# Altium PCB Sequential_Logic_Latch_FF.PcbDoc
Units mm, origin at the board's own origin, x right, y up, seen from the top; angles counter-clockwise.
Board outline 147.9 x 87.5 mm, 2 copper layers (Top Layer, Bottom Layer); 53 components, 47 nets, 208 pads, 16 vias.
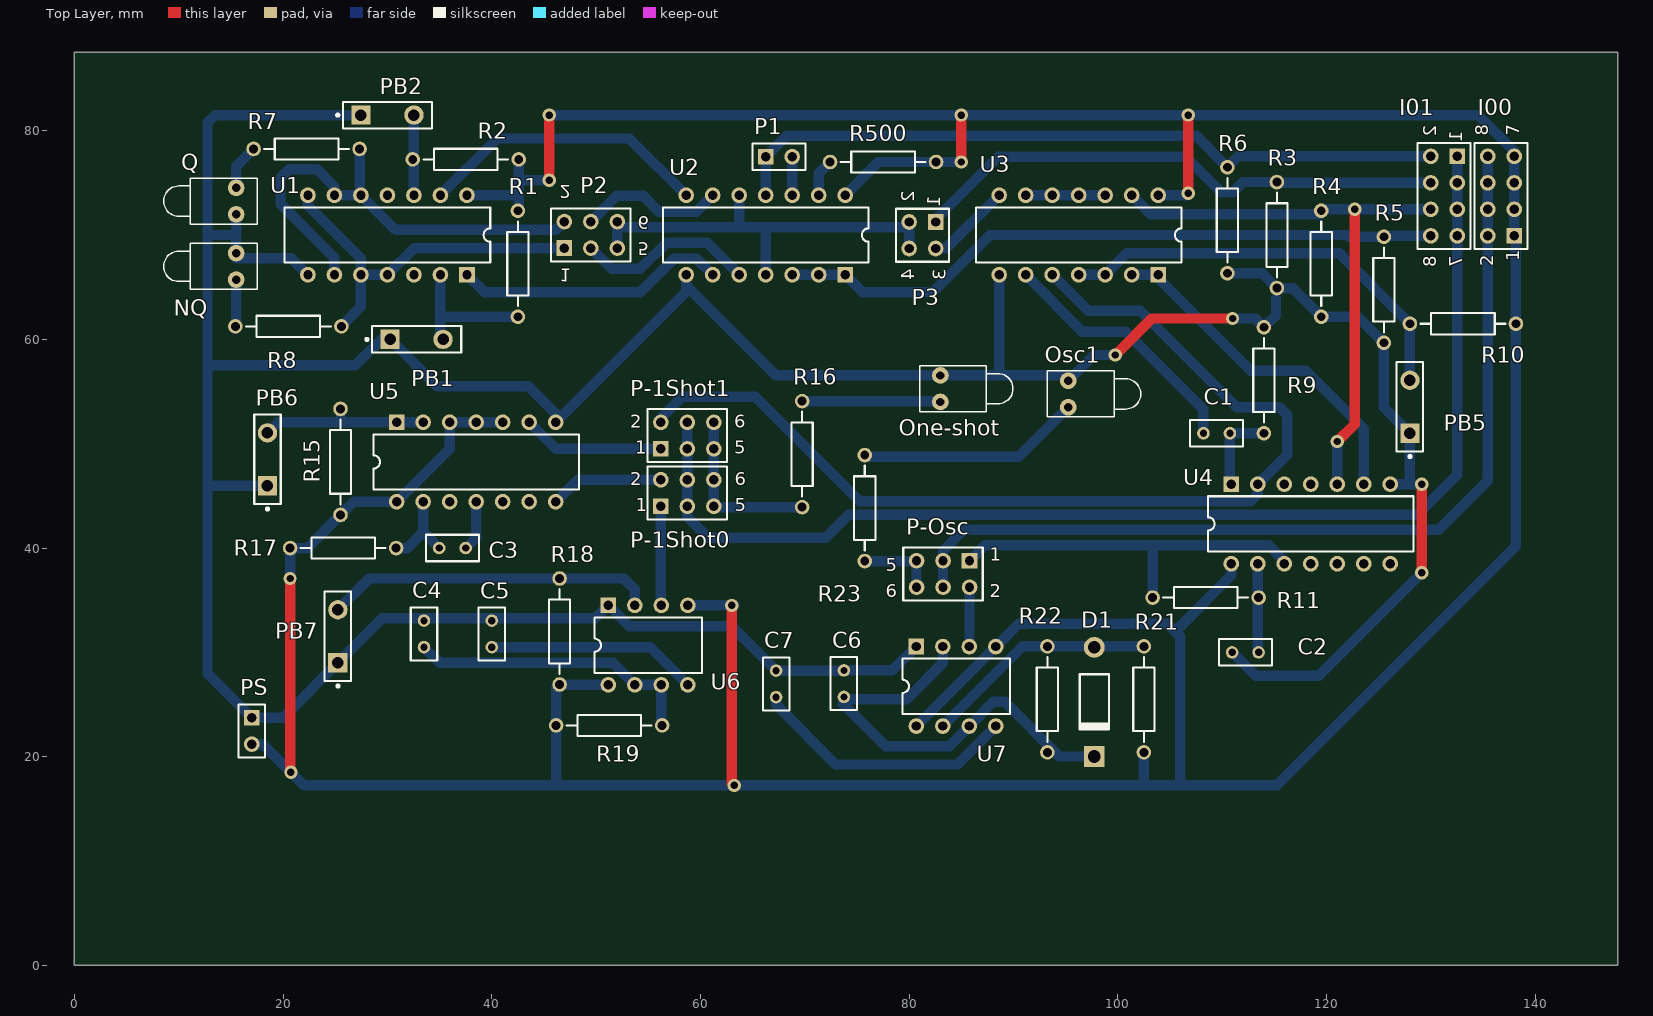
[diagram p0: Top Layer view]
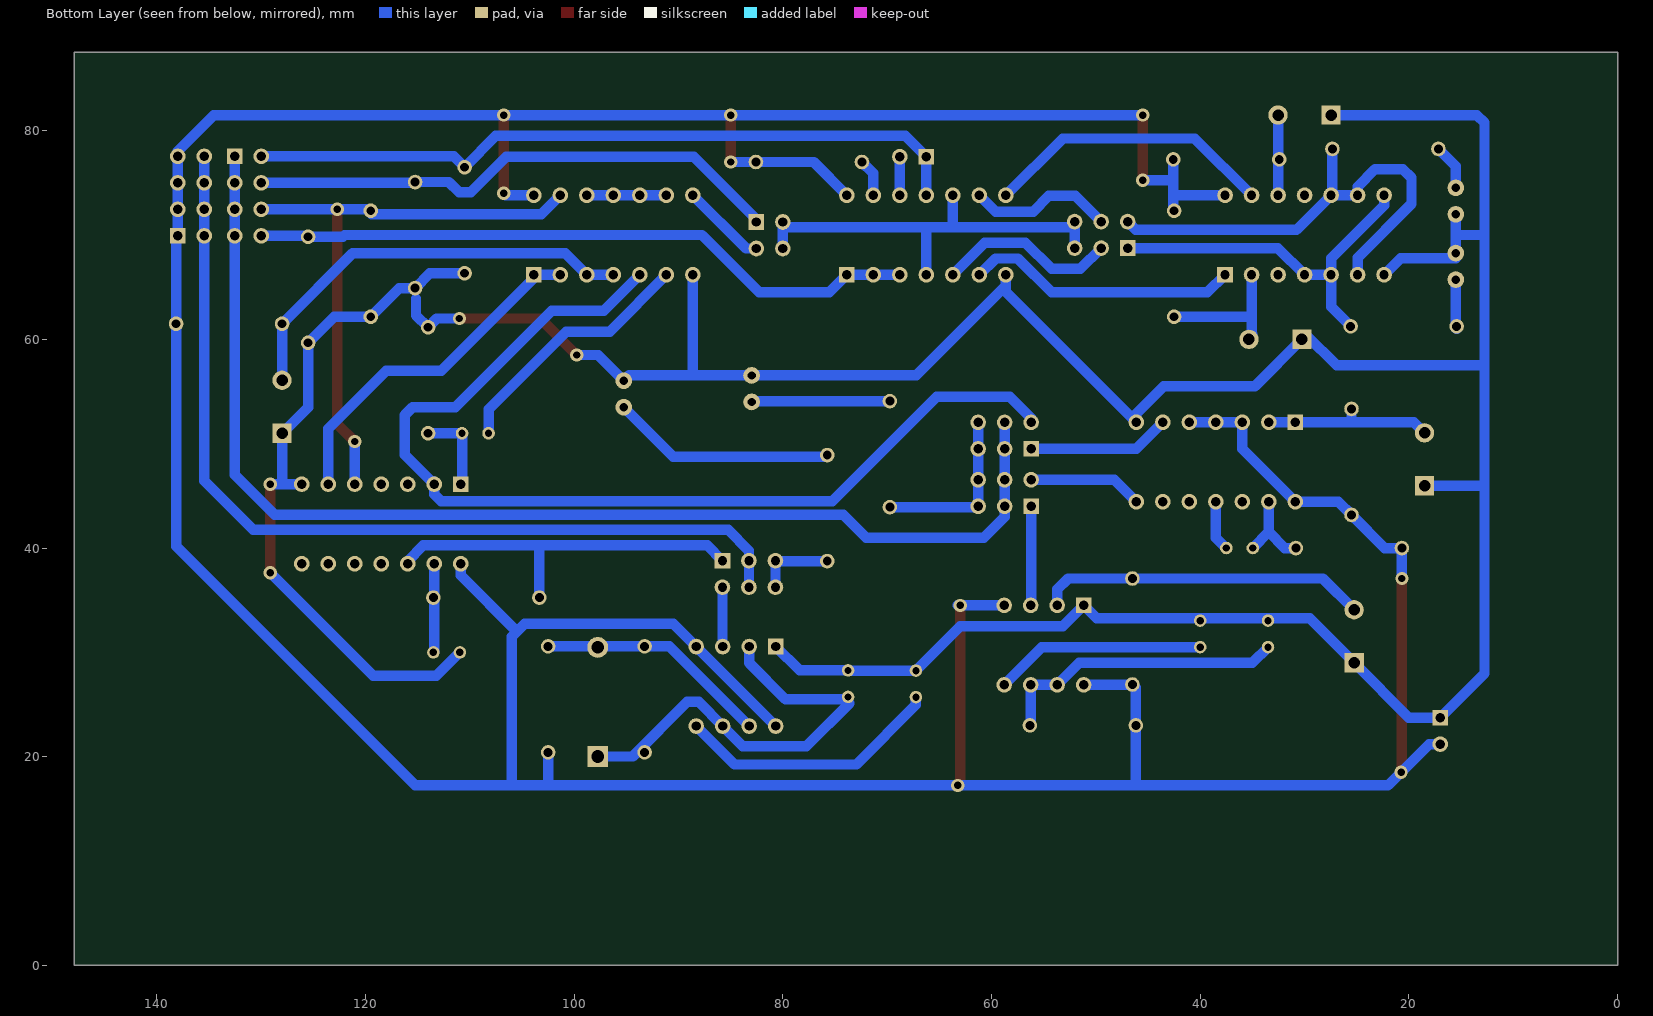
[diagram p1: Bottom Layer view, seen from below]

## Layer stack, top to bottom
Top Solder: solder mask 0.0102, Solder Resist, Dk 3.5
Top Layer: signal copper 0.0356
Dielectric1: dielectric 0.32, FR-4, Dk 4.8
Bottom Layer: signal copper 0.0356
Bottom Solder: solder mask 0.0102, Solder Resist, Dk 3.5

## Board outline
0,0 0,87.5 147.9,87.5 147.9,0

## Design rules (kind name [scope] priority, off if disabled: settings)
AssemblyTestPointUsage [All] p1: valid=2
Clearance [All] p1: gap=0.254
ComponentClearance ComponentClearance_header2x5 [InComponent('I00') vs InComponent('I01')] p1: gap=0.1 collisioncheckmode=3 verticalgap=0.2 showdistances=FALSE
ComponentClearance ComponentClearance_header2x3 [InComponent('P-1Shot1') vs InComponent('P-1Shot0')] p2: gap=0.2 collisioncheckmode=3 verticalgap=0.254 showdistances=FALSE
ComponentClearance [All] p3: gap=0.254 collisioncheckmode=3 verticalgap=0.254 showdistances=FALSE
FabricationTestPointUsage TestPointUsage [All] p1: valid=2 allowmultiple=FALSE
FabricationTestpoint Testpoint [All] p1: side=3 testpointundercomponent=TRUE minsize=1.016 maxsize=2.54 preferedsize=1.524 minholesize=0 maxholesize=1.016 preferedholesize=0.813 testpointgrid=0.025 allowsidetop=TRUE allowsidebottom=TRUE usegrid=TRUE gridtolerance=0
MinimumSolderMaskSliver [All] p1: minsoldermaskwidth=0.15
PolygonConnect [All] p1: connectstyle=Relief reliefconductorwidth=0.254 reliefentries=4 polygonreliefangle="90 Angle" airgapwidth=0.254
RoutingVias [All] p1: holewidth=0.711 width=1.27 viastyle="Through Hole" minholewidth=0.711 minwidth=1.27 maxholewidth=0.711 maxwidth=1.27
SilkToSolderMaskClearance SilkToSolderMaskClearance_LED1 [IsPad vs HasFootprint('LED-1')] p1: minsilkscreentomaskgap=0.06 clearancetoexposedcopper=TRUE
SilkToSolderMaskClearance [IsPad] p2: minsilkscreentomaskgap=0.15 clearancetoexposedcopper=TRUE
SolderMaskExpansion [All] p1: expansion=0.102
Width [All] p1: maxlimit=1.05 minlimit=0.25 preferedwidth=1
24 further rules are at their usual default settings.

## Components (designator, comment, footprint, x,y, rotation, side; value= is the part's Value field where it differs from the comment)
C1 "1uF" RAD-0.1 109.48,51 r0 top
C2 "1uF" RAD-0.1 112.23,30 r0 top
C3 "1uF" RAD-0.1 36.23,40 r180 top
C4 "1uF" RAD-0.1 33.5,31.77 r270 top
C5 "0.01uF" RAD-0.1 40,31.77 r270 top
C6 "1uF" RAD-0.1 73.75,27 r270 top
C7 "0.01uF" RAD-0.1 67.25,26.98 r270 top
D1 "Diode 1N4007" DO-41 97.75,25.25 r270 top
I00 "Header 4X2" HDR2X4#1 138,69.92 r90 top
I01 "Header 4X2" HDR2X4#2 132.54,77.54 r270 top
NQ "LED0" LED-1#1 15.5,67 r180 top
One-shot "LED0" LED-1#2 83,55.27 r0 top
Osc1 "LED0" LED-1#2 95.25,54.77 r0 top
P1 "Header 2" HDR1X2 66.25,77.5 r0 top
P2 "Header 3X2" HDR2X3 46.96,68.75 r0 top
P3 "Header 2X2" HDR2X2 82.54,71.25 r270 top
P-1Shot0 "Header 3X2" HDR2X3 56.21,44 r0 top
P-1Shot1 "Header 3X2" HDR2X3 56.21,49.5 r0 top
P-Osc "Header 3X2" HDR2X3 85.79,38.79 r180 top
PB1 "SW-PB" SPST-2 32.79,60 r0 top
PB2 "SW-PB" SPST-2 30,81.5 r0 top
PB5 "SW-PB" SPST-2 128,53.54 r90 top
PB6 "SW-PB" SPST-2 18.5,48.5 r90 top
PB7 "SW-PB" SPST-2 25.25,31.54 r90 top
PS "Header 2" HDR1X2 17,23.75 r270 top
Q "LED0" LED-1#2 15.5,73.25 r180 top
R1 "1K" AXIAL-0.4 42.5,67.25 r90 top
R2 "1K" AXIAL-0.4 37.5,77.25 r180 top
R3 "1K" AXIAL-0.4 115.25,70 r90 top
R4 "1K" AXIAL-0.4 119.5,67.25 r90 top
R5 "1K" AXIAL-0.4 125.5,64.75 r270 top
R6 "1K" AXIAL-0.4 110.5,71.42 r90 top
R7 "1K" AXIAL-0.4 22.25,78.25 r180 top
R8 "1K" AXIAL-0.4 20.5,61.25 r180 top
R9 "1K" AXIAL-0.4 114,56.08 r270 top
R10 "1K" AXIAL-0.4 133.08,61.5 r0 top
R11 "1K" AXIAL-0.4 108.42,35.25 r180 top
R15 "1K" AXIAL-0.4 25.5,48.25 r270 top
R16 "1K" AXIAL-0.4 69.75,49 r90 top
R17 "1K" AXIAL-0.4 25.75,40 r180 top
R18 "1K" AXIAL-0.4 46.5,32 r270 top
R19 "1K" AXIAL-0.4 51.25,23 r180 top
R21 "1K" AXIAL-0.4 102.5,25.5 r90 top
R22 "1K" AXIAL-0.4 93.25,25.5 r270 top
R23 "1K" AXIAL-0.4 75.75,43.83 r90 top
R500 "1K" AXIAL-0.4 77.5,77 r0 top
U1 "MC74HC20N" 646-06 30,70 r180 top
U2 "MC74HC10N" 646-06 66.25,70 r180 top
U3 "MC74HC10N" 646-06 96.25,70 r180 top
U4 "MC74HC14AN" 646-06 118.5,42.31 r0 top
U5 "SN74LS122N" N014 38.5,48.25 r0 top
U6 "NE555JG" JG008 54.98,30.69 r0 top
U7 "NE555JG" JG008 84.5,26.75 r0 top

## Footprints (in the part's own frame and the unit in brackets; to place one, negate y for a bottom-side part, rotate by r counter-clockwise, add the part's x,y. Pads: shape width x height; smd on the part's side, far side on the other; paste and mask are expansions set on the pad)
646-06 [mm] "DIP; 14 Leads; Row Spacing 7.62 mm; Pitch 2.54 mm"
  rect 1.5x1.5 hole 0.9: 1(-7.62,3.81)
  round 1.5 hole 0.9: 2(-5.08,3.81) 3(-2.54,3.81) 4(0,3.81) 5(2.54,3.81) 6(5.08,3.81) 7(7.62,3.81) 8(7.62,-3.81) 9(5.08,-3.81) 10(2.54,-3.81) 11(0,-3.81) 12(-2.54,-3.81) 13(-5.08,-3.81) 14(-7.62,-3.81)
  silkscreen extent -9.85,-2.65 9.85,2.65
AXIAL-0.4 [mm] "Axial Device, Thru-Hole; 2 Leads; 0.4 in Pin Spacing"
  round 1.4 hole 0.85: 1(-5.08,0) 2(5.08,0)
  silkscreen extent -4.06,-1.02 4.06,1.02
DO-41 [mm] "Diode, Axial; Body 5.2 x 2.7 mm (LxDia. max), Lead Dia. 0.86 mm (max)"
  round 2 hole 1.2: 1(-5.23,0)
  rect 2x2 hole 1.2: 2(5.23,0)
  silkscreen extent -2.65,-1.4 2.75,1.4
HDR1X2 [mm] "Connector; Header; 2 Position"
  rect 1.5x1.5 hole 0.9: 1(0,0)
  round 1.5 hole 0.9: 2(2.54,0)
  silkscreen extent -1.27,-1.27 3.81,1.27
HDR2X2 [mm] "Connector; Header; 2x2 Position"
  rect 1.5x1.5 hole 0.9: 1(0,0)
  round 1.5 hole 0.9: 2(0,-2.54) 3(2.54,0) 4(2.54,-2.54)
  silkscreen extent -1.27,-3.81 3.81,1.27
HDR2X3 [mm] "Connector; Header; 3x2 Position"
  rect 1.5x1.5 hole 0.9: 1(0,0)
  round 1.5 hole 0.9: 2(0,2.54) 3(2.54,0) 4(2.54,2.54) 5(5.08,0) 6(5.08,2.54)
  silkscreen extent -1.27,-1.27 6.35,3.81
HDR2X4#1 [mm] "Connector; Header; 4x2 Position"
  rect 1.5x1.5 hole 0.9: 1(0,0)
  round 1.5 hole 0.9: 2(0,2.54) 3(2.54,0) 4(2.54,2.54) 5(5.08,0) 6(5.08,2.54) 7(7.62,0) 8(7.62,2.54)
  silkscreen extent -1.27,-1.27 8.89,3.81
HDR2X4#2 [mm] "Connector; Header; 4x2 Position"
  rect 1.5x1.5 hole 0.9: 1(0,0)
  round 1.5 hole 0.9: 2(0,-2.54) 3(2.54,0) 4(2.54,-2.54) 5(5.08,0) 6(5.08,-2.54) 7(7.62,0) 8(7.62,-2.54)
  silkscreen extent -1.27,-3.81 8.89,1.27
JG008 [mm] "DIP; 8 Leads; Row Spacing 7.62 mm; Pitch 2.54 mm"
  rect 1.5x1.5 hole 0.9: 1(-3.81,3.81)
  round 1.5 hole 0.9: 2(-1.27,3.81) 3(1.27,3.81) 4(3.81,3.81) 5(3.81,-3.81) 6(1.27,-3.81) 7(-1.27,-3.81) 8(-3.81,-3.81)
  silkscreen extent -5.15,-2.65 5.15,2.65
LED-1#1 [mm] "LED; 2 Leads"
  round 1.6 hole 0.8: 1(0,1.27) 2(0,-1.27)
  silkscreen extent -2,-2.2 6.95,2.2
LED-1#2 [mm] "LED; 2 Leads"
  round 1.6 hole 0.8: 1(0,-1.27) 2(0,1.27)
  silkscreen extent -2,-2.2 6.95,2.2
N014 [mm] "DIP; 14 Leads; Row Spacing 7.62 mm; Pitch 2.54 mm"
  rect 1.5x1.5 hole 0.9: 1(-7.62,3.81)
  round 1.5 hole 0.9: 2(-5.08,3.81) 3(-2.54,3.81) 4(0,3.81) 5(2.54,3.81) 6(5.08,3.81) 7(7.62,3.81) 8(7.62,-3.81) 9(5.08,-3.81) 10(2.54,-3.81) 11(0,-3.81) 12(-2.54,-3.81) 13(-5.08,-3.81) 14(-7.62,-3.81)
  silkscreen extent -9.85,-2.65 9.85,2.65
RAD-0.1 [mm] "Radial Cap, Thru-Hole; 2 Leads; 0.1 in Pin Spacing"
  round 1.2 hole 0.7: 1(-1.27,0) 2(1.27,0)
  silkscreen extent -2.54,-1.27 2.54,1.27
SPST-2 [mm] "Switch; 2 Leads"
  rect 1.85x1.85 hole 1.1: 1(-2.54,0)
  round 1.85 hole 1.1: 2(2.54,0)
  silkscreen extent -4.89,-1.27 4.28,1.27

## Part data
C1 C2 C3 C4 C5 C6 C7: library part Cap, "Capacitor"
D1: "1 Amp General Purpose Rectifier"
I00 I01: "Header, 4-Pin, Dual row"
NQ One-shot Osc1 Q: "Typical INFRARED GaAs LED"
P1 PS: "Header, 2-Pin"
P2 P-1Shot0 P-1Shot1 P-Osc: "Header, 3-Pin, Dual row"
P3: "Header, 2-Pin, Dual row"
PB1 PB2 PB5 PB6 PB7: "Switch"
R1 R2 R3 R4 R5 R6 R7 R8 R9 R10 R11 R15 R16 R17 R18 R19 R21 R22 R23 R500: library part Res2, "Resistor"
U1: "Dual 4-Input NAND Gate"
U2 U3: "Triple 3-Input NAND Gate"
U4: "Hex Schmitt Trigger Inverter"
U5: "Retriggerable Monostable Multivibrator"
U6 U7: "Precision Timer"

## Via types
v1: diameter 1.27, hole 0.711, Top Layer to Bottom Layer, 16 vias

## Nets (pads, with @x,y where several pads share a name; then routed paths per layer and width w, separated by ;. In a path a pad name is that pad's centre, name@x,y a point inside that pad or via, vN(x,y) a via of type N, cw(c..) or ccw(c..) an arc to the next point about the centre after c; other vN are vias at no path point)
CLEAR(LOW): PB2.2 R2.2 U1.12 | length 7.7
  Bottom Layer w1: U1.12 PB2.2
CLK: I01.6 R4.2 U3.13 U4.5 | length 56.6
  Top Layer w1: v1(121.04,50.21) 122.71,51.88 v1(122.71,72.46)
  Bottom Layer w1: U3.13 103.14,72 119.42,72 119.75,72.33 119.88,72.46 v1(122.71,72.46) I01.6 ; U4.5 v1(121.04,50.21)
EN: I01.4 P3.1 R3.2 | length 52.1
  Bottom Layer w1: P3.1 82.54,71.5 88.54,77.5 106.5,77.5 109.92,74.08 111,74.08 112,75.08 R3.2 115.33,75 I01.4
GND: C2.1 C4.1 C5.1 C6.1 C7.1 NQ.2 One-shot.2 Osc1.2 PB1.1 PB2.1 PB5.1 PB6.1 PB7.1 PS.1 Q.2 R3.1 R4.1 R5.2 R6.1 R9.1 U1.7 U2.7 U3.7 U4.7 U5.7 U6.1 U7.1 | length 365
  Top Layer w1: v1(99.75,58.5) 103.25,62 v1(111,62) ; v1(129.13,37.63) v1(129.13,46.12)
  Bottom Layer w1: 12.96,45.96 PB6.1 ; Q.2@15.5,72.23 15.5,70 ; U1.7 20.8,67.77 15.5,67.77 15.5,70 ; PB2.1 13.5,81.5 12.75,80.75 12.75,69.75 ; PB1.1@29.835,60.415 26.92,57.5 12.75,57.5 ; PB1.1 34.75,55.5 43.5,55.5 46.12,52.88 U5.7 58.63,64.57 U2.7 ; 58.63,65.12 67.21,56.54 One-shot.2 88.5,56.54 ; U7.1 78.4,28.27 C6.1 73.73,28.25 C7.1 63,32.5 53.17,32.5 U6.1 49.92,33.25 29.5,33.25 PB7.1 20,23.75 PS.1 12.75,28 12.75,57.5 ; U3.7 88.63,56.67 88.5,56.54 ; v1(99.75,58.5) 97.71,58.5 Osc1.2 94.75,56.54 88.5,56.54 ; R6.1 112.747,66.34 113.83,66.34 R3.1 116.75,64.92 R4.1 123,62.17 R5.2 125.5,53.5 PB5.1 128,46.12 ; C2.1 113.21,27.75 119.25,27.75 v1(129.13,37.63) ; v1(111,62) 113.16,62 R9.1 115.167,62.327 115.167,63.92 ; U4.7 128,46.12 ; v1(129.13,46.12) 128,46.12 ; 12.75,57.5 12.75,69.75 ; 12.75,69.75 13,70 15.5,70
J/D: I01.8 R5.1 U2.1 U2.2 U2.3 | length 64.3
  Bottom Layer w1: U2.3 U2.2 U2.1 75.56,64.5 82.25,64.5 87.75,70 122,70 122.17,69.83 R5.1 125.59,69.92 I01.8
K: I01.2 P1.1 R6.2 U2.11 | length 69.9
  Bottom Layer w1: U2.11 P1.1 68.25,79.5 107.5,79.5 R6.2 111.54,77.54 I01.2
NetC1_1: C1.1 U3.6 | length 24.7
  Bottom Layer w1: U3.6 96.61,60.75 100.75,60.75 108.21,53.29 C1.1
NetC1_2: C1.2 R9.2 U4.1 | length 8.2
  Bottom Layer w1: U4.1 110.75,46.25 C1.2 R9.2
NetC2_2: C2.2 R11.1 U4.13 | length 8.5
  Bottom Layer w1: U4.13 113.42,30.08 C2.2
NetC3_1: C3.1 U5.11 | length 4.9
  Bottom Layer w1: C3.1 38.5,41 U5.11
NetC3_2: C3.2 R17.1 U5.13 | length 8.3
  Bottom Layer w1: R17.1 31.88,40 33.42,41.54 ; U5.13 33.42,41.54 ; C3.2 33.42,41.54
NetC4_2: C4.2 R19.1 U6.6 U6.7 | length 28.2
  Bottom Layer w1: C4.2 35,29 51.59,29 U6.7 U6.6 56.25,23.08 R19.1
NetC5_2: C5.2 U6.5 | length 20.3
  Bottom Layer w1: C5.2 55.17,30.5 U6.5
NetC6_2: C6.2 D1.2 R22.2 U7.2 U7.6 | length 42.4
  Bottom Layer w1: 73.615,25.135 77.75,21 83.83,21 U7.6 88.08,25.25 89.17,25.25 94.4,20.02 D1.2 ; C6.2 73.98,25.5 79.75,25.5 83.23,28.98 U7.2
NetC7_2: C7.2 U7.5 | length 25.7
  Bottom Layer w1: C7.2 67.25,24.98 72.98,19.25 84.62,19.25 U7.5
NetD1_1: D1.1 R21.2 R22.1 U7.7 | length 22.4
  Bottom Layer w1: U7.7 90.87,30.58 R22.1 R21.2
NetI00_2: I00.2 I00.4 I00.6 I00.8 P-Osc.3 P-Osc.4 | length 89.6
  Bottom Layer w1: P-Osc.4 P-Osc.3 83.25,39.75 85.25,41.75 130.75,41.75 135.46,46.46 I00.2 I00.4 I00.6 I00.8
NetI01_1: I01.1 I01.3 I01.5 I01.7 P-1Shot0.3 P-1Shot0.4 P-1Shot1.3 P-1Shot1.4 | length 116.7
  Bottom Layer w1: P-1Shot1.4 P-1Shot1.3 P-1Shot0.4 P-1Shot0.3 58.75,43 60.75,41 72,41 74.2,43.2 128.7,43.2 132.54,47.04 I01.7 I01.5 I01.3 I01.1
NetNQ_1: NQ.1 R8.2 | length 4.1
  Bottom Layer w1: R8.2@15.42,61 R8.2@15.5,61.08 ; R8.2 15.5,61.33 NQ.1@15.5,65.23
NetOne-shot_1: One-shot.1 R16.2 | length 13.3
  Bottom Layer w1: R16.2 82.92,54.08 One-shot.1
NetOsc1_1: Osc1.1 R23.2 | length 21.5
  Bottom Layer w1: R23.2 75.91,48.75 90.5,48.75 Osc1.1
NetP1_2: P1.2 U2.12 | length 3.7
  Bottom Layer w1: U2.12 P1.2
NetP2_3: P2.3 U2.5 | length 17.3
  Bottom Layer w1: P2.3 51.5,66.75 54.25,66.75 56.75,69.25 60.65,69.25 U2.5
NetP2_4: P2.4 U2.9 | length 14
  Bottom Layer w1: P2.4 51.96,73.75 54.5,73.75 56,72.25 59.61,72.25 U2.9
NetP2_5: P2.5 P2.6 P3.2 P3.4 U2.4 U2.10 | length 39.6
  Bottom Layer w1: P2.5 52.04,70.75 63.71,70.75 ; U2.10 63.71,70.75 ; U2.4 66.25,70.75 ; P3.4 80,70.75 66.25,70.75 ; 63.71,70.75 66.25,70.75
NetP3_3: P3.3 U3.8 | length 8.2
  Bottom Layer w1: P3.3 83.53,68.71 U3.8
NetP-1Shot0_1: P-1Shot0.1 U6.3 | length 9.5
  Bottom Layer w1: P-1Shot0.1 56.21,34.54 U6.3
NetP-1Shot0_2: P-1Shot0.2 U5.8 | length 11
  Bottom Layer w1: U5.8 48.22,46.54 P-1Shot0.2
NetP-1Shot0_5: P-1Shot0.5 P-1Shot0.6 P-1Shot1.5 P-1Shot1.6 R16.1 | length 16.5
  Bottom Layer w1: P-1Shot1.6 P-1Shot1.5 P-1Shot0.6 P-1Shot0.5 61.37,43.92 R16.1
NetP-1Shot1_1: P-1Shot1.1 U5.6 | length 13.7
  Bottom Layer w1: U5.6 46.14,49.5 P-1Shot1.1
NetP-1Shot1_2: P-1Shot1.2 U3.5 U4.2 | length 99.9
  Bottom Layer w1: P-1Shot1.2 56.21,52.46 58.25,54.5 65.25,54.5 75.25,44.5 112.75,44.5 113.42,45.17 U4.2 116.25,48.95 116.25,52.75 115.5,53.5 111.41,53.5 102.16,62.75 97.15,62.75 U3.5 ; U4.2@113.42,46.31 U4.2@113.5,46.39
NetP-Osc_1: P-Osc.1 R11.2 U4.12 | length 36.4
  Bottom Layer w1: P-Osc.1 87.25,40.25 103.25,40.25 ; R11.2 103.34,40.16 103.25,40.25 ; U4.12@115.96,38.75 114.46,40.25 103.25,40.25
NetP-Osc_2: P-Osc.2 U7.3 | length 5.7
  Bottom Layer w1: U7.3 85.79,30.58 P-Osc.2
NetP-Osc_5: P-Osc.5 P-Osc.6 R23.1 | length 7.5
  Bottom Layer w1: R23.1 80.67,38.75 P-Osc.5 P-Osc.6
NetPB5_2: PB5.2 R10.1 U3.3 U3.4 | length 40.8
  Bottom Layer w1: U3.4 U3.3 100.85,68.25 121.25,68.25 R10.1 PB5.2
NetPB6_2: PB6.2 R15.1 U5.1 U5.2 | length 16.7
  Bottom Layer w1: PB6.2 19.52,52.06 25.25,52.06 ; R15.1 25.5,52.31 25.25,52.06 ; U5.2 U5.1 25.25,52.06
NetPB7_2: PB7.2 R18.1 U6.2 | length 31.7
  Bottom Layer w1: PB7.2 28.25,37.08 R18.1 52.67,37.08 53.71,36.04 U6.2
NetQ_1: Q.1 R7.2 | length 4.4
  Bottom Layer w1: Q.1 15.5,76.58 R7.2
NetR500_1: R500.1 U2.13 | length 3.6
  Bottom Layer w1: U2.13 71.33,75.91 R500.1
NetU1_1: U1.1 U2.6 | length 26.2
  Bottom Layer w1: U1.1 39.31,64.5 54.25,64.5 57.5,67.75 59.61,67.75 U2.6
NetU1_13: U1.13 U2.8 | length 28.1
  Bottom Layer w1: U1.13 40.52,79.25 53.19,79.25 U2.8
NetU3_1: U3.1 U3.2 U4.6 | length 33.8
  Bottom Layer w1: U3.2 U3.1 103.87,65.88 112.75,57 118,57 123.58,51.42 U4.6
NetU3_9: U3.9 U3.10 U3.11 U3.12 | length 7.6
  Bottom Layer w1: U3.9 U3.10 U3.11 U3.12
NQ: P2.1 R8.1 U1.4 U1.5 U1.8 | length 36
  Bottom Layer w1: U1.8 22.38,72.87 27.46,67.79 U1.5 ; R8.1 27.46,63.13 U1.5 ; P2.1 32.56,68.75 U1.4 U1.5
PRE(LOW): PB1.2 R1.1 U1.2 | length 13.2
  Bottom Layer w1: PB1.2@35,60.5 35.08,60.58 35.08,62 ; U1.2 35.08,62 ; R1.1 35.25,62.17 35.08,62
Q: P2.2 R7.1 U1.6 U1.9 U1.10 | length 46.7
  Bottom Layer w1: U1.6 24.92,67.83 19.75,73 19.75,75.5 20.57,76.32 23.25,76.32 24.92,74.65 U1.9 U1.10 ; R7.1 27.33,73.94 U1.10 ; P2.2 46.17,70.5 30.77,70.5 U1.10
VDD: I00.1 I00.3 I00.5 I00.7 PS.2 R1.2 R2.1 R10.2 R15.2 R17.2 R18.2 R19.2 R21.1 R500.2 U1.14 U2.14 U3.14 U4.14 U5.3 U5.4 U5.5 U5.14 U6.4 U6.8 U7.4 U7.8 | length 451.3
  Top Layer w1: v1(20.67,37.08) 20.67,18.58 v1(20.75,18.5) ; v1(45.5,75.25) v1(45.5,81.5) ; v1(63,34.5) 63,17.5 v1(63.25,17.25) ; v1(85,77) v1(85,81.5) ; v1(106.75,74) v1@106.75,81.25
  Bottom Layer w1: PS.2 18.04,21.21 v1(20.75,18.5) 22,17.25 46.5,17.25 ; v1(20.67,37.08) R17.2 22.33,40 R15.2 26.77,44.44 U5.14 35.96,49.52 U5.3 U5.4 U5.5 ; U1.14 42.52,73.81 42.58,73.75 ; R1.2 42.58,72.41 42.58,73.75 ; R2.1 42.58,75.25 ; v1(45.5,75.25) 42.58,75.25 ; v1(45.5,81.5) v1(85,81.5) v1(106.75,81.5) 134.54,81.5 138,78.04 I00.7 I00.5 I00.3 I00.1 138.16,69.76 R10.2 138.16,40.16 115.25,17.25 106,17.25 ; U6.8 46.54,26.88 R18.2 46.17,26.59 R19.2 46.17,17.58 46.5,17.25 ; U6.4 v1(63,34.5) v1@63.25,34.5 ; U2.14 77.06,77 R500.2 v1(85,77) ; U7.8 U7.4 90.5,32.75 104.75,32.75 105.5,32 ; R21.1 102.5,17.25 ; U3.14 106.56,73.81 v1(106.75,74) ; U4.14 110.88,37.38 105.5,32 ; 42.58,73.75 42.58,75.25 ; 46.5,17.25 v1(63.25,17.25) 102.5,17.25 ; 102.5,17.25 106,17.25 ; 105.5,32 106,31.5 106,17.25
pads on no net: U1.3 U1.11 U4.3 U4.4 U4.8 U4.9 U4.10 U4.11 U5.9 U5.10 U5.12

## Silkscreen, mask and mechanical layers (free items; w line width, h text height)
Mechanical 16:
  drawing of 1874 lines, arcs and shapes, not listed
  text "1" at -33.779,135.511 h1.78
  text "2" at 38.865,135.511 h1.78
  text "3" at 112.017,135.511 h1.78
  text "4" at 184.915,135.511 h1.78
  text "A" at -68.12,112.499 h1.78
  text "A" at 218.9,112.499 h1.78
  text "B" at -68.12,64.442 h1.78
  text "B" at 218.9,64.442 h1.78
  text "C" at -68.12,15.928 h1.78
  text "C" at 218.9,15.928 h1.78
  text "ENGINEER:" at 103.965,-21.08 h1.14
  text "TITLE:" at 142.065,-21.08 h1.14
  text "PCB DESIGNER:" at 103.965,-28.573 h1.14
  text "D" at -68.12,-32.078 h1.78
  text "D" at 218.9,-32.078 h1.78
  text "DATE:" at 103.965,-36.32 h1.14
  text "PART NO.:" at 142.065,-36.32 h1.14
  text "REV:" at 195.405,-36.32 h1.14
  text "Altium Limited" at 70.945,-38.86 h1.78
  text ".PRINT_DATE" at 105.235,-39.368 h1.78
  text "12a Rodborough Rd" at 70.945,-41.4 h1.78
  text "Frenchs Forest" at 70.945,-43.94 h1.78
  text "FILE NAME:" at 103.965,-43.94 h1.14
  text "DWG NO:" at 142.065,-43.94 h1.14
  text "SCALE:" at 195.405,-43.94 h1.14
  text "NSW 2086" at 70.945,-46.48 h1.78
  text ".PCB_FILE_NAME_NO_PATH" at 105.235,-46.988 h1.78
  text "1" at -33.779,-52.449 h1.78
  text "2" at 38.865,-52.449 h1.78
  text "3" at 112.017,-52.449 h1.78
  text "4" at 184.915,-52.449 h1.78

## Text inside footprints (layer, text, board x,y; h text height)
I00: Top Overlay "8" at 135.5,79.5 h1.27 r90; Top Overlay "7" at 138.5,79.5 h1.27 r90; Top Overlay "1" at 138.5,67.5 h1.27 r90; Top Overlay "2" at 136,67 h1.27 r90
I01: Top Overlay "8" at 130.5,68 h1.27 r90; Top Overlay "7" at 133,68 h1.27 r90; Top Overlay "1" at 133,80 h1.27 r90; Top Overlay "2" at 130.5,80.5 h1.27 r90
P2: Top Overlay "1" at 46.5,66.79 h1.27 r180; Top Overlay "2" at 46.5,74.79 h1.27 r180; Top Overlay "5" at 54,69.29 h1.27 r180; Top Overlay "6" at 54,71.79 h1.27 r180
P3: Top Overlay "3" at 83.5,66.75 h1.27 r90; Top Overlay "4" at 80.5,66.75 h1.27 r90; Top Overlay "2" at 80.5,74.25 h1.27 r90; Top Overlay "1" at 83,73.75 h1.27 r90
P-1Shot0: Top Overlay "1" at 53.79,43.54 h1.27; Top Overlay "2" at 53.29,46.04 h1.27; Top Overlay "5" at 63.29,43.54 h1.27; Top Overlay "6" at 63.29,46.04 h1.27
P-1Shot1: Top Overlay "1" at 53.75,49.04 h1.27; Top Overlay "2" at 53.25,51.54 h1.27; Top Overlay "5" at 63.25,49.04 h1.27; Top Overlay "6" at 63.25,51.54 h1.27
P-Osc: Top Overlay "1" at 87.75,38.79 h1.27; Top Overlay "2" at 87.75,35.29 h1.27; Top Overlay "5" at 77.75,37.79 h1.27; Top Overlay "6" at 77.75,35.29 h1.27